# Altium PCB alarm_timing.PcbDoc
Units mm, origin at the board's own origin, x right, y up, seen from the top; angles counter-clockwise.
Board outline 60.07 x 57.28 mm, 2 copper layers (Top Layer, Bottom Layer); 44 components, 30 nets, 163 pads, 8 vias.
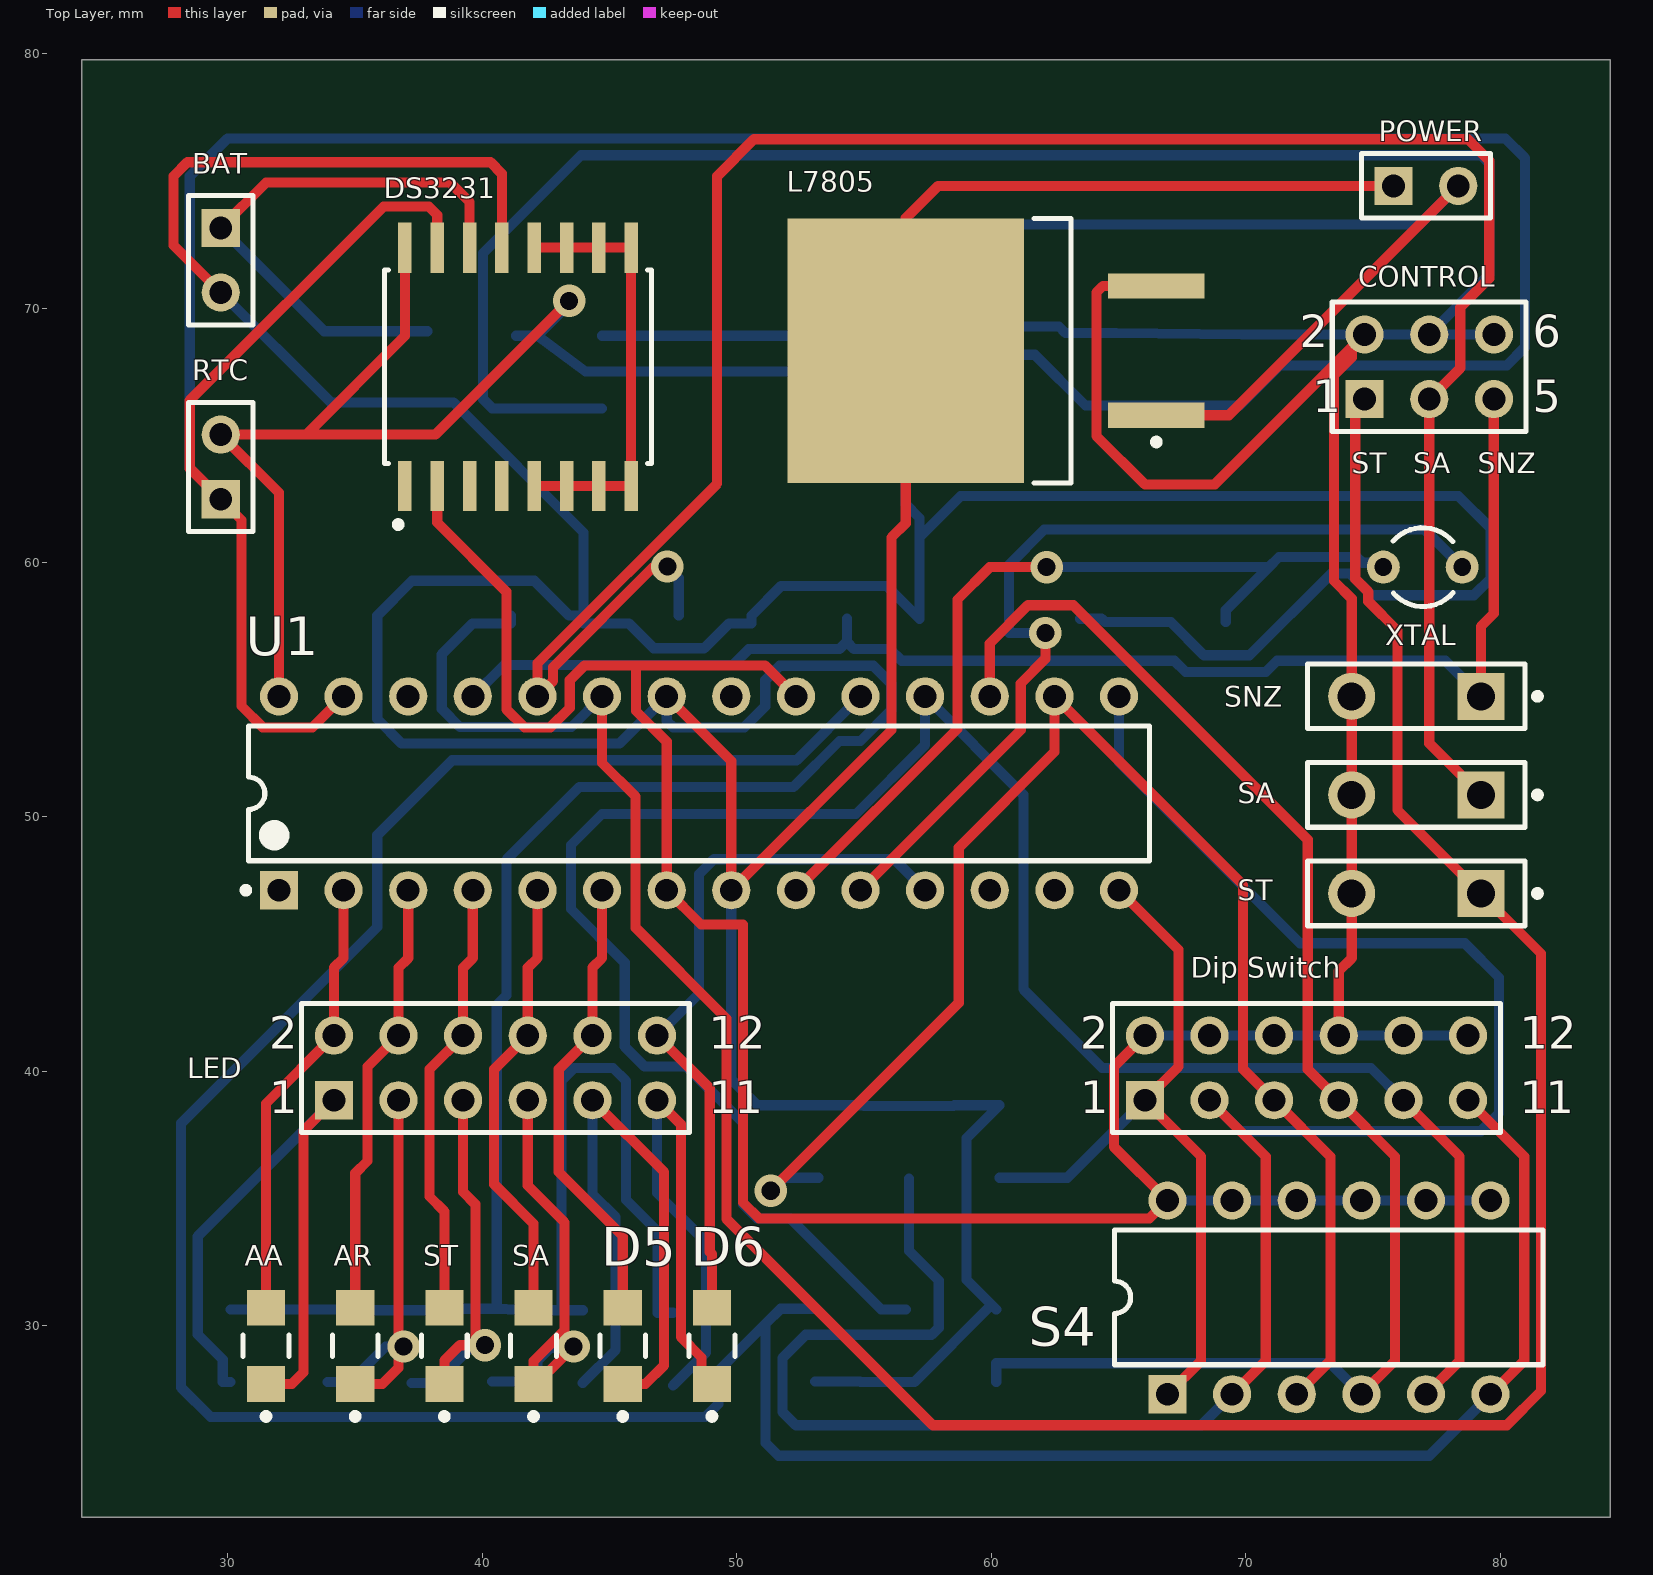
[diagram p0: Top Layer view]
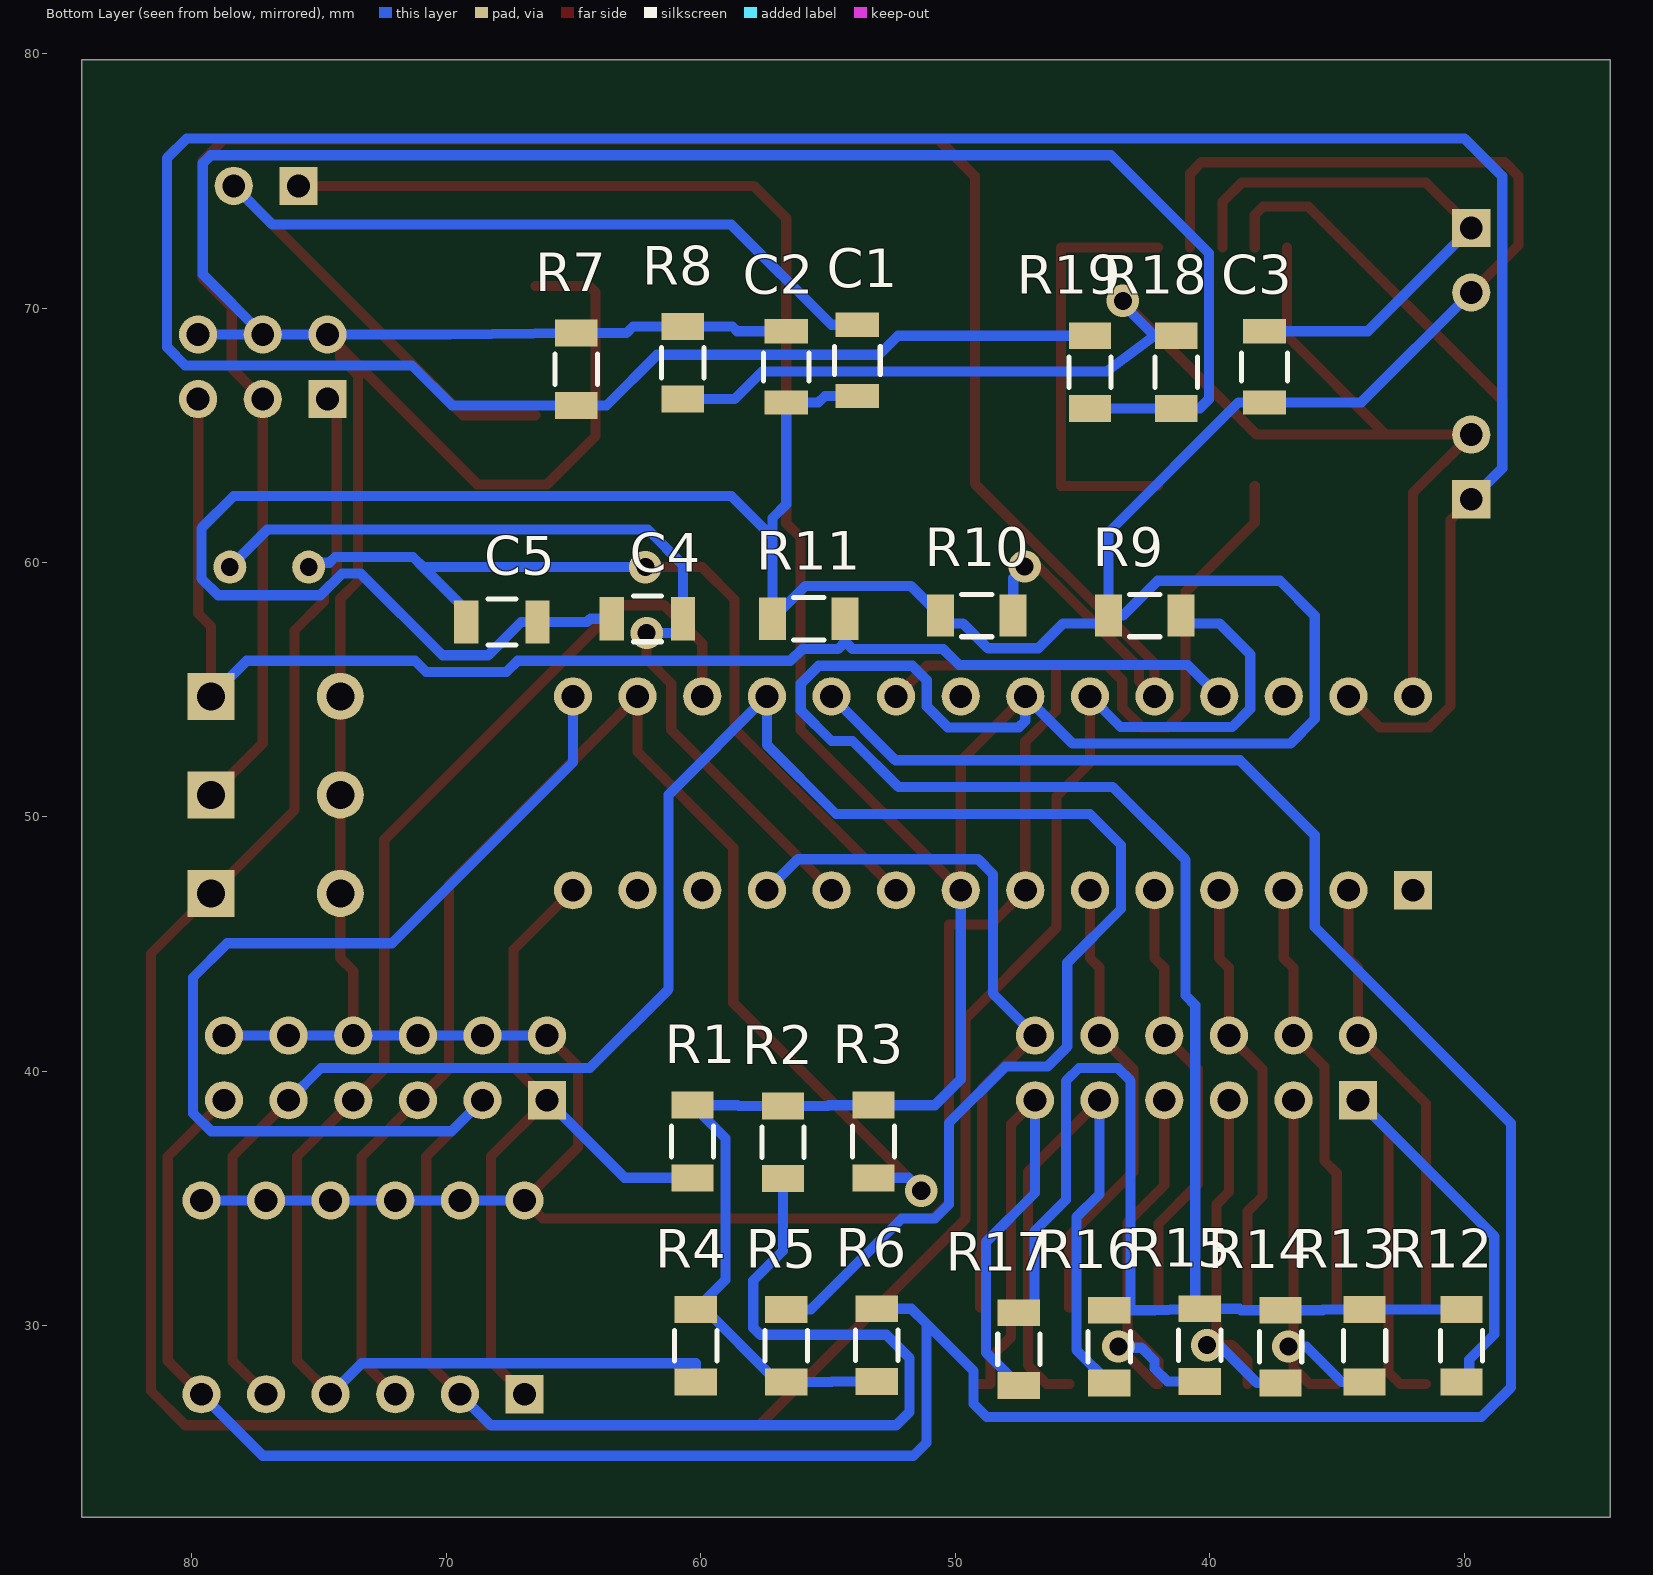
[diagram p1: Bottom Layer view, seen from below]
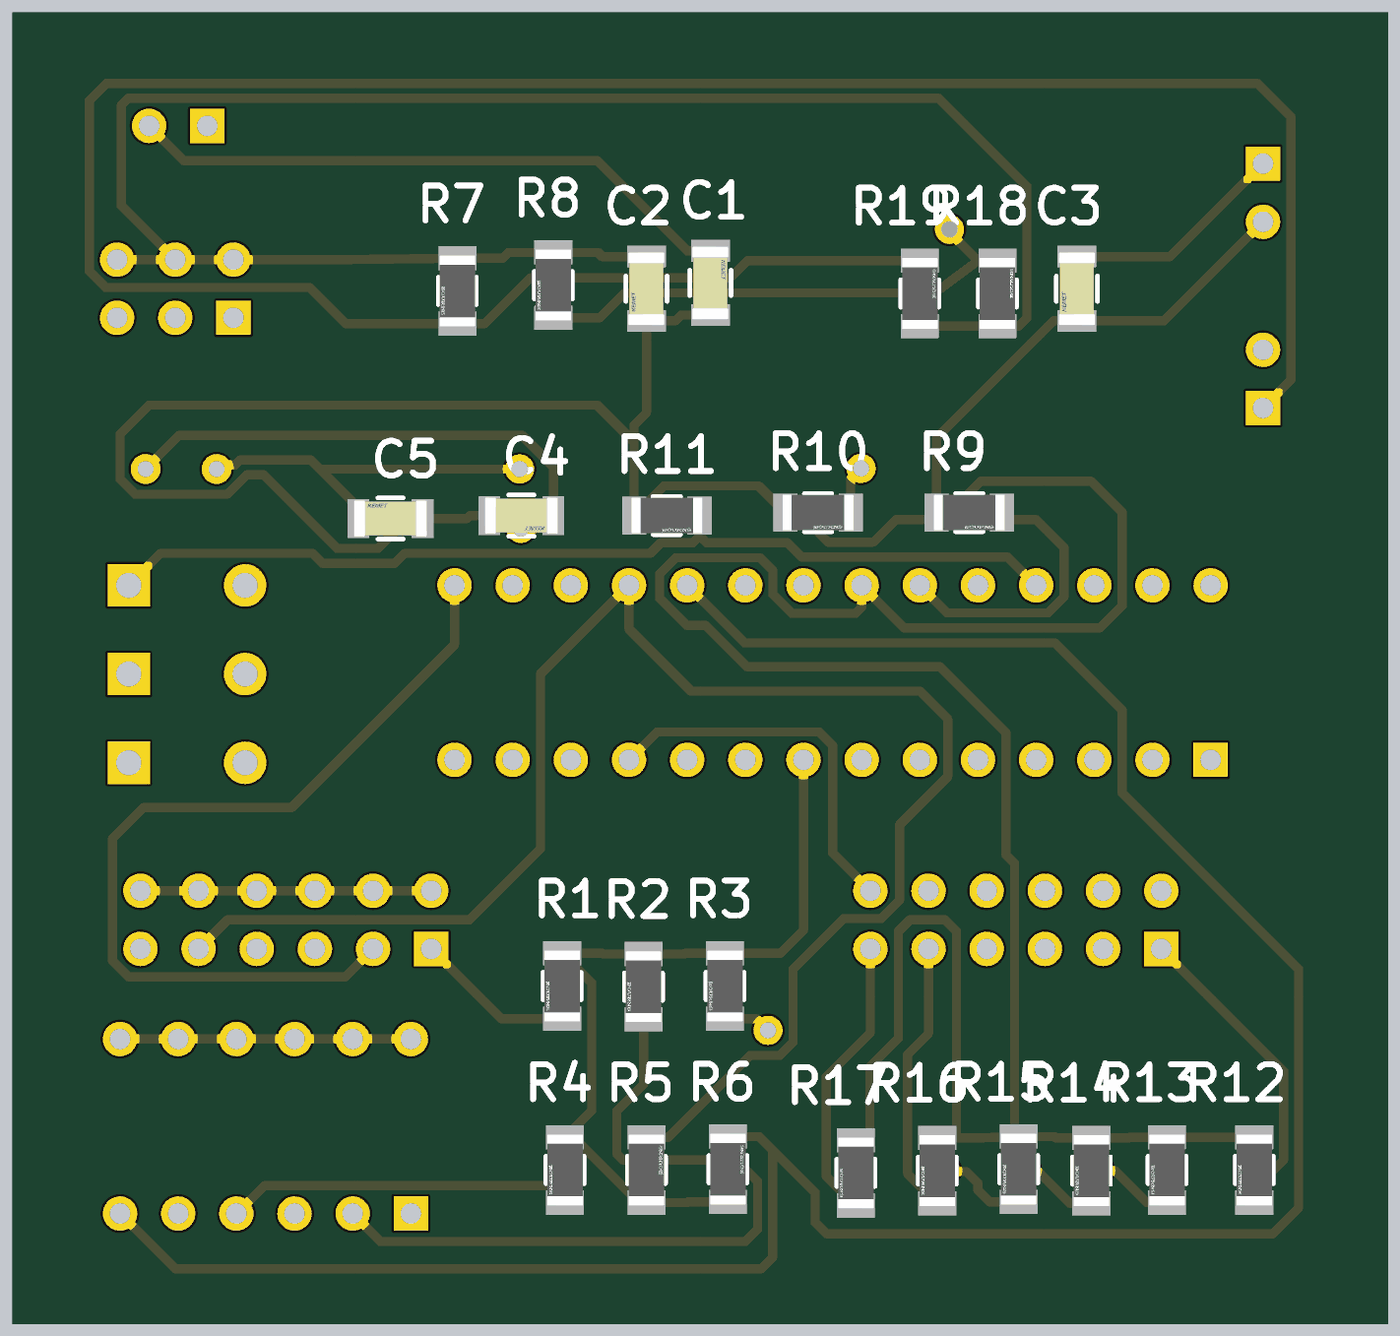
[diagram p2: 3D render of the assembled board from below, using the file's embedded part models]

## Layer stack, top to bottom
Top Solder: solder mask 0.0102, Solder Resist, Dk 3.5
Top Layer: signal copper 0.0356
Dielectric 1: dielectric 0.32, FR-4, Dk 4.8
Bottom Layer: signal copper 0.0356
Bottom Solder: solder mask 0.0102, Solder Resist, Dk 3.5

## Board outline
24.257,22.479 84.328,22.479 84.328,79.756 24.257,79.756

## Design rules (kind name [scope] priority, off if disabled: settings)
Clearance [All] p1: gap=0.254 ignorepadtopadclearanceinfootprint=FALSE except(0: Arc-Hole Track-Hole SMDPad-Hole THPad-Hole Via-Hole Fill-Hole Poly-Hole Region-Hole Text-Hole)
PolygonConnect [All] p1: connectstyle=Relief reliefconductorwidth=0.254 reliefentries=4 polygonreliefangle="90 Angle" airgapwidth=0.254
RoutingVias [All] p1: holewidth=0.711 width=1.27 viastyle="Through Hole" minholewidth=0.711 minwidth=1.27 maxholewidth=0.711 maxwidth=1.27
SolderMaskExpansion [All] p1: expansion=0.102 istentingtop=FALSE
Width [All] p1: maxlimit=0.6 minlimit=0.254 preferedwidth=0.4
30 further rules are at their usual default settings.

## Classes and differential pairs
component class DS3231: BAT C3 DS3231 R18 R19
component class alarm_timing: AA AR C1 C2 C4 C5 CONTROL "Dip Switch" H L7805 LED M POWER R1 R2 R3 R4 R5 R6 R7 R8 R9 R10 R11 R12 R13 R14 R15 R16 R17 RTC S4 SA SNZ ST U1 XTAL

## Components (designator, comment, footprint, x,y, rotation, side; value= is the part's Value field where it differs from the comment)
AA "" FP-598-82-MFG 31.496,29.21 r90 top (schematic designator D1)
AR "" FP-598-82-MFG 35.001,29.21 r90 top (schematic designator D2)
BAT "Header 2" HDR1X2 29.718,73.152 r270 top (schematic designator P6)
C1 "0.33uF" FP-C1206C-EB-MFG 53.848,67.945 r270 bottom value="0.33 μF"
C2 "0.1uF" FP-C1206C-EB-MFG 56.642,67.691 r90 bottom value="0.33 μF"
C3 "0.01uF" FP-C1206C-EB-MFG 37.846,67.691 r90 bottom value="0.33 μF"
C4 "" FP-C1206C-EB-MFG 62.103,57.785 r0 bottom value="0.10 μF"
C5 "" FP-C1206C-EB-MFG 67.818,57.658 r180 bottom value="0.10 μF"
CONTROL "Control" HDR2X3 74.676,66.421 r0 top (schematic designator P4)
D5 "" FP-598-82-MFG 45.517,29.21 r90 top
D6 "" FP-598-82-MFG 49.022,29.21 r90 top
"Dip Switch" "DipSwitch" HDR2X6 66.04,38.862 r0 top (schematic designator P1)
DS3231 "DS3231SN#T&R" FP-W16-H2-MFG 41.402,67.691 r90 top (schematic designator U3)
L7805 "L7805" TO-263_N 60.192,68.326 r180 top (schematic designator U2)
LED "LED" HDR2X6 34.163,38.862 r0 top (schematic designator P5)
POWER "POWER" HDR1X2 75.819,74.803 r0 top (schematic designator P2)
R1 "" FP-CR1206-IPC_B 60.325,37.241 r270 bottom
R2 "" FP-CR1206-IPC_B 56.769,37.211 r270 bottom
R3 "" FP-CR1206-IPC_B 53.213,37.241 r270 bottom
R4 "" FP-CR1206-IPC_B 60.198,29.21 r270 bottom
R5 "" FP-CR1206-IPC_B 56.642,29.21 r90 bottom
R6 "" FP-CR1206-IPC_B 53.086,29.24 r90 bottom
R7 "" FP-CR1206-IPC_B 64.897,67.594 r270 bottom
R8 "" FP-CR1206-IPC_B 60.706,67.848 r270 bottom
R9 "" FP-CR1206-IPC_B 42.545,57.912 r180 bottom
R10 "" FP-CR1206-IPC_B 49.149,57.912 r180 bottom
R11 "" FP-CR1206-IPC_B 55.753,57.785 r180 bottom
R12 "" FP-CR1206-IPC_B 30.099,29.21 r270 bottom
R13 "" FP-CR1206-IPC_B 33.909,29.21 r270 bottom
R14 "" FP-CR1206-IPC_B 37.211,29.18 r270 bottom
R15 "" FP-CR1206-IPC_B 40.386,29.24 r270 bottom
R16 "" FP-CR1206-IPC_B 43.942,29.18 r270 bottom
R17 "" FP-CR1206-IPC_B 47.498,29.083 r270 bottom
R18 "" FP-CR1206-IPC_B 41.316,67.485 r90 bottom
R19 "" FP-CR1206-IPC_B 44.704,67.485 r90 bottom
RTC "RTC Clock" HDR1X2 29.718,62.484 r90 top (schematic designator P3)
S4 "SW DIP-6" DIP-12/SW 73.279,31.115 r0 top
SA "" SPST-2 76.708,50.863 r180 top (schematic designator S2)
SA "" FP-598-82-MFG 42.012,29.21 r90 top (schematic designator D4)
SNZ "" SPST-2 76.708,54.737 r180 top (schematic designator S3)
ST "" SPST-2 76.708,46.99 r180 top (schematic designator S1)
ST "" FP-598-82-MFG 38.506,29.21 r90 top (schematic designator D3)
U1 "ATmega328P-PU" 28P3 48.514,50.927 r90 top
XTAL "XTAL" R38 76.962,59.817 r90 top (schematic designator Y1)

## Footprints (in the part's own frame and the unit in brackets; to place one, negate y for a bottom-side part, rotate by r counter-clockwise, add the part's x,y. Pads: shape width x height; smd on the part's side, far side on the other; paste and mask are expansions set on the pad)
28P3 [mm] "28-Pin Plastic Dual In-Line Package (PDIP)"
  rect 1.5x1.5 hole 0.9: 1(-3.81,16.51)
  round 1.5 hole 0.9: 2(-3.81,13.97) 3(-3.81,11.43) 4(-3.81,8.89) 5(-3.81,6.35) 6(-3.81,3.81) 7(-3.81,1.27) 8(-3.81,-1.27) 9(-3.81,-3.81) 10(-3.81,-6.35) 11(-3.81,-8.89) 12(-3.81,-11.43) 13(-3.81,-13.97) 14(-3.81,-16.51) 15(3.81,-16.51) 16(3.81,-13.97) 17(3.81,-11.43) 18(3.81,-8.89) 19(3.81,-6.35) 20(3.81,-3.81) 21(3.81,-1.27) 22(3.81,1.27) 23(3.81,3.81) 24(3.81,6.35) 25(3.81,8.89) 26(3.81,11.43) 27(3.81,13.97) 28(3.81,16.51)
  silkscreen extent -3.93,-17.7 2.65,17.93, body extent -3.6,-17.65 3.6,17.65, height 4.58
DIP-12/SW [mm] "DIP Switch; 12 Leads"
  rect 1.5x1.5 hole 0.9: 1(-6.35,-3.81)
  round 1.5 hole 0.9: 2(-3.81,-3.81) 3(-1.27,-3.81) 4(1.27,-3.81) 5(3.81,-3.81) 6(6.35,-3.81) 7(6.35,3.81) 8(3.81,3.81) 9(1.27,3.81) 10(-1.27,3.81) 11(-3.81,3.81) 12(-6.35,3.81)
  silkscreen extent -8.43,-2.65 8.41,2.65
FP-598-82-MFG [mm]
  rect 1.4x1.5 smd paste+0 mask+0: 1(-1.5,0) 2(1.5,0)
  silkscreen extent -2.9,-0.9 0.42,0.9, body extent -2.3,-1 2.3,1, height 0.25
FP-C1206C-EB-MFG [mm]
  rect 0.95x1.7 smd paste+0 mask+0: 1(-1.4,0) 2(1.4,0)
  silkscreen extent -0.55,-0.9 0.55,0.9, body extent -1.6,-0.8 1.6,0.8, height 0.88
FP-CR1206-IPC_B [mm]
  rect 1.058x1.662 smd paste+0 mask+0: 1(-1.427,0) 2(1.427,0)
  silkscreen extent -0.6,-0.83 0.6,0.83, body extent -1.55,-0.77 1.55,0.77, height 0.65
FP-W16-H2-MFG [mm]
  rect 1.98x0.53 smd paste+0 mask+0: 1(-4.685,4.445) 2(-4.685,3.175) 3(-4.685,1.905) 4(-4.685,0.635) 5(-4.685,-0.635) 6(-4.685,-1.905) 7(-4.685,-3.175) 8(-4.685,-4.445) 9(4.685,-4.445) 10(4.685,-3.175) 11(4.685,-1.905) 12(4.685,-0.635) 13(4.685,0.635) 14(4.685,1.905) 15(4.685,3.175) 16(4.685,4.445)
  silkscreen extent -6.32,-5.25 3.8,5.25, body extent -5.78,-5.43 5.77,5.43, height 0.25
HDR1X2 [mm] "Connector; Header; 2 Position"
  rect 1.5x1.5 hole 0.9: 1(0,0)
  round 1.5 hole 0.9: 2(2.54,0)
  silkscreen extent -1.27,-1.27 3.81,1.27
HDR2X3 [mm] "Connector; Header; 3x2 Position"
  rect 1.5x1.5 hole 0.9: 1(0,0)
  round 1.5 hole 0.9: 2(0,2.54) 3(2.54,0) 4(2.54,2.54) 5(5.08,0) 6(5.08,2.54)
  silkscreen extent -1.27,-1.27 6.35,3.81
HDR2X6 [mm] "Connector; Header; 6x2 Position"
  rect 1.5x1.5 hole 0.9: 1(0,0)
  round 1.5 hole 0.9: 2(0,2.54) 3(2.54,0) 4(2.54,2.54) 5(5.08,0) 6(5.08,2.54) 7(7.62,0) 8(7.62,2.54) 9(10.16,0) 10(10.16,2.54) 11(12.7,0) 12(12.7,2.54)
  silkscreen extent -1.27,-1.27 13.97,3.81
R38 [mm] "Crystal, Thru-Hole; 2 Leads; Body 3.1 x 8.2 mm (Dia.xH)"
  round 1.3 hole 0.7: 1(0,1.55) 2(0,-1.55)
  silkscreen extent -1.55,-1.19 1.55,1.17
SPST-2 [mm] "Switch; 2 Leads"
  rect 1.85x1.85 hole 1.1: 1(-2.54,0)
  round 1.85 hole 1.1: 2(2.54,0)
  silkscreen extent -4.89,-1.27 4.28,1.27
TO-263_N [mm] "D2-PAK, 4-Leads, Body 9.2x10.2mm, Pitch 2.54mm, Lead Span 15.4mm, IPC Medium Density"
  rect 3.8x1 smd: 1(-6.3,2.54) 3(-6.3,-2.54)
  rect 9.3x10.4 smd: 4(3.55,0)
  silkscreen extent -6.43,-5.2 -1.5,5.2, body extent -2.95,-5.2 6.4,5.2, height 4.6

## Part data
AA AR D5 D6 SA ST: library part CMP-15384-000005-1, "LED RED CLEAR 1206 SMD", Colour=Red, Forward Current=20mA, Forward Voltage=2.1V, Manufacturer=Dialight, Manufacturer Part Number=598-8210-107F, Max Junction Temp=+105°C, Package=598-82, Power Dissipation=72mW, Reverse Voltage=5V, Temperature="-40°C to +100°C", Temperature Range High=+100°C, Temperature Range Low=-40°C, Automotive=No, Category=Diode, ComponentLink2Description=Datasheet, ComponentLink2URL=http://www.dialightsignalsandcomponents.com/Assets/Brochures_And_Catalogs/Indication/CBI_SMD_new/Dialight_CBI_data_598-1206_Apr2018.pdf, Device Class L1=Optoelectronics, Device Class L2=LEDs, Device Class L3=unset, Digikey Description="LED RED CLEAR 1206 SMD", Height=0.9mm, Lead Free=Yes, Led Orientation="Top View", Luminous Intensity=55mcd, Mouser Description="598 Series Red 1206 3.2 x 1.6 x 0.7 mm 140° Water Clear 55 mcd 2 V LED SMT", Octopart=https://octopart.com/598-8210-107f-dialight-868600, RoHS=TRUE, Viewing Angle=140°, Wavelength=633nm
BAT: "Header, 2-Pin", LatestRevisionDate=17-Jul-2002, LatestRevisionNote="Re-released for DXP Platform.", Publisher="Altium Limited"
C1 C2 C3: library part CMP-03020-001426-1, "1206 C 330nF Ceramic Multilayer Capacitor; 25 VDC; +125degC; X7R Dielec; +/-10%", Capacitance="0.33 μF", Manufacturer=KEMET, Manufacturer Part Number=C1206C334K3RACTU, Package=C1206C-EB, Temperature="-55°C to +150°C", Temperature Characteristic=X7R, Temperature Coefficient=15%, Temperature Range High=+150°C, Temperature Range Low=-55°C, Tolerance=0.1, Voltage Rating="25 V", Automotive=Yes, Automotive Grade="Grade 0", Category=Cap, ComponentLink2Description=Datasheet, ComponentLink2URL=https://content.kemet.com/datasheets/KEM_C1007_X8R_ULTRA_150C_SMD.pdf, Device Class L1="Passive Components", Device Class L2=Capacitors, Device Class L3="Ceramic Capacitors", Digikey Description="1206 C 330nF Ceramic Multilayer Capacitor; 25 VDC; +125degC; X7R Dielec; +/-10%", Height=0.88mm, Ipc Land Pattern Name=CAPC320160X78, Lead Free=Yes, Material=Ceramic, Mouser Description="Multilayer Ceramic Capacitors MLCC - SMD/SMT 25volts 0.33uF X7R 10%", Octopart=https://octopart.com/c1206c334k3ractu-kemet-133095, RoHS=TRUE
C4 C5: library part CMP-03020-000153-1, "CAP CER 0.1UF 100V X7R 1206", Capacitance="0.10 μF", Manufacturer=KEMET, Manufacturer Part Number=C1206C104K1RACTU, Package=C1206C-EB, Temperature="-55°C to +150°C", Temperature Characteristic=X7R, Temperature Coefficient=15%, Temperature Range High=+150°C, Temperature Range Low=-55°C, Tolerance=0.1, Voltage Rating="100 V", Automotive=Yes, Automotive Grade="Grade 0", Category=Cap, ComponentLink2Description=Datasheet, ComponentLink2URL=https://content.kemet.com/datasheets/KEM_C1007_X8R_ULTRA_150C_SMD.pdf, Device Class L1="Passive Components", Device Class L2=Capacitors, Device Class L3="Ceramic Capacitors", Digikey Description="CAP CER 0.1UF 100V X7R 1206", Height=0.88mm, Ipc Land Pattern Name=CAPC320160X78, Lead Free=Yes, Material=Ceramic, Mouser Description="CAP CER 0.1UF 100V X7R 1206", Octopart=https://octopart.com/c1206c104k1ractu-kemet-89521, RoHS=TRUE
CONTROL: library part "Header 3X2", "Header, 3-Pin, Dual row", LatestRevisionDate=17-Jul-2002, LatestRevisionNote="Re-released for DXP Platform.", Publisher="Altium Limited"
"Dip Switch" LED: library part "Header 6X2", "Header, 6-Pin, Dual row", LatestRevisionDate=17-Jul-2002, LatestRevisionNote="Re-released for DXP Platform.", Publisher="Altium Limited"
DS3231: library part CMP-0254-00375-2, "IC RTC CLK/CALENDAR I2C 16-SOIC", Case/Package=SOIC, Max Operating Temperature=85°C, Max Supply Voltage=5.5V, Min Operating Temperature=-40°C, Min Supply Voltage=2.3V, Operating Supply Voltage=3.3V, Package Quantity=1000, Contact Plating=Tin, Date Format=YY-MM-DD-dd, Interface=I2C, Lead Free="Lead Free", Logic Function=Clock, Mount="Surface Mount", Number of Pins=16, Packaging="Tape and Reel", Radiation Hardening=No, Time Format=HH:MM:SS
L7805: library part CMP-0244-00214-1, "Positive Voltage Regulator, 3-Pin D2PAK, Tape and Reel", ComponentLink1Description="Manufacturer URL", ComponentLink1URL=http://www.st.com, ComponentLink2Description=Datasheet, ComponentLink2URL=http://www.st.com/internet/com/TECHNICAL_RESOURCES/TECHNICAL_LITERATURE/DATASHEET/CD00000444.pdf, DatasheetVersion=16/11/2011, PackageDescription="3-Pin Transistor Outline Package 2.54 mm Pitch, 15.4 mm Lead Span (D2PAK)", PackageReference=TO-263, PackageVersion=2011
POWER RTC: library part "Header 2", "Header, 2-Pin", LatestRevisionDate=17-Jul-2002, LatestRevisionNote="Re-released for DXP Platform.", Publisher="Altium Limited"
R1 R2 R3 R4 R5 R6 R7 R8 R9 R10 R11 R12 R13 R14 R15 R16 R17 R18 R19: library part CMP-07231-005593-1, "Thick Film Chip Resistors 1206 10kΩ 0.25W 5% 200ppm/°C", Case Code (Imperial)=1206, Case Code (Metric)=3216, Max Operating Temperature=155°C, Max Power Dissipation=250mW, Min Operating Temperature=-55°C, Package Quantity=1, Resistance=10kR, Temperature Coefficient=200ppm/°C, Tolerance=5%, Voltage Rating=200V, Case/Package=1206, Composition="Thick Film", Contact Plating=Tin, Depth=1.6mm, Features="Moisture Resistant", Height=0.6mm, Length=3.2mm, Military Standard=Not, Mount="Surface Mount", Number of Pins=2, Number of Terminations=2, Packaging="Tape and Reel", Power Rating=250mW, Radiation Hardening=No, REACH SVHC="No SVHC", Termination=SMD/SMT, Thickness=610um, Voltage Rating (DC)=200V, Width=1.6mm
S4: "DIP Switch, 6 Position, SPST", LatestRevisionDate=17-Jul-2002, LatestRevisionNote="Re-released for DXP Platform.", PackageDescription="DIP Switch; 12 Leads", PackageReference=DIP-12/SW, Published=24-Mar-1999, Publisher="Altium Limited"
SA SNZ ST: library part SW-PB, "Switch", LatestRevisionDate=17-Jul-2002, LatestRevisionNote="Re-released for DXP Platform.", PackageDescription="Switch; 2 Leads", PackageReference=SPST-2, Published=24-Mar-1999, Publisher="Altium Limited"
U1: library part CMP-0095-00013-2, "8-bit AVR Microcontroller, 32KB Flash, 1KB EEPROM, 2KB SRAM, 28-pin PDIP, Industrial Grade (-40°C to 85°C)", ComponentLink1Description="Manufacturer URL", ComponentLink1URL=http://www.atmel.com/, ComponentLink2Description="ATmega48A/48PA/88A/88PA/168A/168PA/328/328P Datasheet", ComponentLink2URL=http://www.atmel.com/dyn/resources/prod_documents/8271.pdf, ComponentLink3Description="ATmega48A/48PA/88A/88PA/168A/168PA/328/328P Summary", ComponentLink3URL=http://www.atmel.com/dyn/resources/prod_documents/8271S.pdf, DatasheetVersion="revD, May-2011", PackageDescription="28-lead (0.300\"/7.62mm Wide) Plastic Dual Inline Package (PDIP)", PackageReference=28P3, PackageVersion="revB, Sep-2001", RevisionNote="DatasheetVersion updated. URLs added."
XTAL: "Crystal Oscillator", LatestRevisionDate=17-Jul-2002, LatestRevisionNote="Re-released for DXP Platform.", PackageDescription="Crystal, Thru-Hole; 2 Leads; Body 3.1 x 8.2 mm (Dia.xH)", PackageReference=R38, Published=8-Jun-2000, Publisher="Altium Limited"

## Via types
v1: diameter 1.27, hole 0.711, Top Layer to Bottom Layer, 8 vias

## Nets (pads, with @x,y where several pads share a name; then routed paths per layer and width w, separated by ;. In a path a pad name is that pad's centre, name@x,y a point inside that pad or via, vN(x,y) a via of type N, cw(c..) or ccw(c..) an arc to the next point about the centre after c; other vN are vias at no path point)
CS1: CONTROL.1 R9.2 ST.1@79.248,46.99 U1.23 | length 113.4
  Top Layer w0.4: U1.23 44.704,52.121 46.025,50.8 46.025,45.644 49.59,42.078 49.59,34.202 57.706,26.086 80.264,26.086 81.61,27.432 81.61,44.628 79.248,46.99 75.971,50.267 75.971,57.328 74.822,58.477 74.822,58.846 74.308,59.36 74.308,66.053 CONTROL.1
  Bottom Layer w0.4: R9.2 41.118,57.607 39.624,57.607 38.405,56.388 38.405,54.244 39.116,53.533 43.5,53.533 U1.23
CS2: CONTROL.3 R10.2 SA.1@79.248,50.863 U1.24 | length 91.1
  Top Layer w0.4: v1(47.269,59.842) 46.742,59.842 42.78,55.88 42.78,55.353 U1.24 42.164,56.038 49.225,63.1 49.225,75.184 50.673,76.632 78.74,76.632 79.578,75.794 79.578,71.171 78.435,70.028 78.435,67.64 CONTROL.3 77.216,52.895 SA.1@79.248,50.863
  Bottom Layer w0.4: v1(47.269,59.842) 47.722,59.39 R10.2
CS3: CONTROL.5 R11.2 SNZ.1 U1.25 | length 54.6
  Top Layer w0.4: SNZ.1 79.248,57.485 79.756,57.993 CONTROL.5
  Bottom Layer w0.4: U1.25 40.86,55.973 49.844,55.973 50.466,56.595 54.025,56.595 54.326,56.896 ; R11.2 54.326,56.896 ; SNZ.1 77.851,56.134 71.235,56.134 70.801,55.7 67.635,55.7 67.201,56.134 56.478,56.134 56.017,56.595 54.61,56.595 54.326,56.879 54.326,56.896
DS1: "Dip Switch.1" R1.2 S4.1 U1.14 | length 29.8
  Top Layer w0.4: U1.14 67.361,44.78 67.361,40.183 66.04,38.862 68.25,36.652 68.25,28.626 S4.1
  Bottom Layer w0.4: R1.2 62.992,35.814 66.04,38.862
DS2: "Dip Switch.3" R2.2 S4.2 U1.15 | length 85.1
  Top Layer w0.4: 68.58,38.862 70.79,36.652 70.79,28.626 S4.2
  Bottom Layer w0.4: R2.2 56.769,32.944 57.937,31.775 57.937,29.921 57.658,29.642 52.705,29.642 51.791,28.727 51.791,26.619 52.324,26.086 68.25,26.086 S4.2 ; U1.15 65.024,52.146 72.136,45.034 78.613,45.034 79.959,43.688 79.959,38.354 79.248,37.643 69.799,37.643 68.58,38.862
DS3: "Dip Switch.5" R3.2 S4.3 U1.16 | length 58.6
  Top Layer w0.4: v1(51.333,35.306) 58.725,42.697 58.725,48.789 62.484,52.549 U1.16 69.901,47.32 69.901,40.081 71.12,38.862 73.33,36.652 73.33,28.626 S4.3
  Bottom Layer w0.4: v1(51.333,35.306) 51.841,35.814 R3.2
DS4: "Dip Switch.7" R4.2 S4.4 U1.17 | length 58.4
  Top Layer w0.4: U1.17 59.944,56.817 61.443,58.315 63.224,58.315 72.441,49.098 72.441,40.081 73.66,38.862 75.87,36.652 75.87,28.626 S4.4
  Bottom Layer w0.4: R4.2 60.198,28.524 73.33,28.524 S4.4
DS5: "Dip Switch.9" R5.2 S4.5 U1.18 | length 86.3
  Top Layer w0.4: 76.2,38.862 78.41,36.652 78.41,28.626 S4.5
  Bottom Layer w0.4: R5.2 55.677,30.637 52.1,34.214 50.8,34.214 50.241,34.773 50.241,37.973 48.031,40.183 46.379,40.183 45.593,40.969 45.593,44.272 43.485,46.38 43.485,48.895 44.704,50.114 54.686,50.114 57.404,52.832 U1.18 61.265,50.876 61.265,43.231 64.364,40.132 74.93,40.132 76.2,38.862
DS6: "Dip Switch.11" R6.2 S4.6 U1.19 | length 121.5
  Top Layer w0.4: 78.74,38.862 80.95,36.652 80.95,28.626 S4.6
  Bottom Layer w0.4: R6.2 51.724,30.667 51.13,30.074 ; U1.19 52.352,52.225 38.814,52.225 35.865,49.276 35.865,45.669 28.16,37.964 28.16,27.568 29.312,26.416 48.768,26.416 49.276,26.924 49.276,28.219 51.13,30.074 ; S4.6 77.216,24.892 51.638,24.892 51.13,25.4 51.13,30.074
GND: BAT.2 C1.2 C2.1 C3.1 C4.2 C5.2 DS3231.13 L7805.4 POWER.1 R1.1 R2.1 R3.1 R4.1 R5.1 R6.1 R9.1 R10.1 R11.1 R12.1 R13.1 R14.1 R15.1 R16.1 R17.1 U1.8 U1.22 | length 318.2
  Top Layer w0.4: BAT.2 27.86,72.47 27.86,75.184 28.404,75.728 40.324,75.728 40.767,75.286 DS3231.13 ; U1.22 49.784,52.197 U1.8 56.083,53.416 56.083,60.985 56.642,61.544 L7805.4 56.642,73.533 57.912,74.803 POWER.1
  Bottom Layer w0.4: BAT.2 34.039,66.291 C3.1 38.862,66.291 43.972,61.181 R9.1 ; R12.1 R13.1 35.535,30.637 35.565,30.607 R14.1 38.76,30.607 38.82,30.667 R15.1 ; R16.1 43.104,30.607 ; R17.1 46.888,30.51 46.888,33.706 45.644,34.95 45.644,39.624 45.136,40.132 43.612,40.132 43.104,39.624 43.104,30.607 ; U1.8 49.784,39.684 50.8,38.668 R3.1 54.966,38.668 54.996,38.638 R2.1 58.522,38.638 58.552,38.668 R1.1 59.03,37.373 59.03,31.805 R4.1@60.012,30.823 ; R6.1 54.839,27.813 54.869,27.783 R5.1 56.972,27.783 R4.1@60.012,30.823 ; C1.2 55.118,66.545 55.372,66.291 C2.1 56.642,62.285 57.18,61.747 57.18,60.99 ; R4.1 R4.1@60.012,30.823 ; C4.2 64.34,57.785 64.467,57.658 C5.2 67.056,57.658 68.36,56.354 70.155,56.354 73.364,59.563 74.105,59.563 74.955,58.713 78.969,58.713 79.629,59.373 79.629,61.341 78.359,62.611 58.801,62.611 57.18,60.99 ; R15.1 42.173,30.607 43.104,30.607 ; R15.1 40.564,30.667 40.564,42.596 40.945,42.977 40.945,48.311 43.815,51.181 52.233,51.181 54.036,52.984 54.864,52.984 56.068,54.188 56.068,55.236 55.363,55.941 51.689,55.941 51.12,55.372 51.12,54.346 50.292,53.518 47.498,53.518 47.244,53.772 U1.22 45.386,52.879 36.834,52.879 35.865,53.848 35.865,57.912 37.236,59.284 42.037,59.284 43.409,57.912 R9.1 ; R9.1 43.972,57.607 45.756,57.607 46.736,56.627 48.717,56.627 49.697,57.607 50.576,57.607 R10.1 51.744,59.08 55.885,59.08 R11.1 57.18,60.99
LED1: AA.2 LED.2 U1.2 | length 17.7
  Top Layer w0.4: AA.2 31.496,38.735 LED.2 34.163,44.069 34.544,44.45 U1.2
LED1Out: AA.1 LED.1 R12.2 | length 26.9
  Top Layer w0.4: AA.1 32.512,27.71 32.969,28.167 32.969,37.668 LED.1
  Bottom Layer w0.4: R12.2 29.794,27.783 29.794,28.674 28.814,29.654 28.814,33.513 LED.1
LED2: AR.2 LED.4 U1.3 | length 17.3
  Top Layer w0.4: AR.2 35.001,35.992 35.484,36.474 35.484,40.183 LED.4 36.703,44.069 37.084,44.45 U1.3
LED2Out: AR.1 LED.3 R13.2 | length 16.3
  Top Layer w0.4: AR.1 36.068,27.71 36.703,28.345 v1@36.703,29.185 ; LED.3 v1@36.703,29.185 ; v1(36.906,29.185) v1@36.703,29.185
  Bottom Layer w0.4: R13.2 34.798,27.783 36.2,29.185 v1(36.906,29.185)
LED3: LED.6 ST.2@38.506,30.71 U1.4 | length 17.4
  Top Layer w0.4: ST.2@38.506,30.71 38.506,34.493 37.922,35.077 37.922,40.081 LED.6 39.243,44.069 39.624,44.45 U1.4
LED3Out: LED.5 R14.2 ST.1@38.506,27.71 | length 16.1
  Top Layer w0.4: ST.1@38.506,27.71 38.506,28.626 39.116,29.235 v1@39.726,29.235 ; LED.5 39.243,35.255 39.726,34.773 v1@39.726,29.235 ; v1(40.107,29.235) v1@39.726,29.235
  Bottom Layer w0.4: R14.2 38.142,27.753 39.624,29.235 v1(40.107,29.235)
LED4: LED.8 SA.2@42.012,30.71 U1.5 | length 17.8
  Top Layer w0.4: SA.2@42.012,30.71 42.012,34.011 40.462,35.56 40.462,40.081 LED.8 41.783,44.069 42.164,44.45 U1.5
LED4Out: LED.7 R15.2 SA.1@42.012,27.71 | length 18.4
  Top Layer w0.4: LED.7 41.783,35.509 43.231,34.061 43.231,29.82 42.012,28.6 42.012,27.71 42.112,27.71 v1(43.586,29.185)
  Bottom Layer w0.4: R15.2 41.656,27.813 42.164,28.321 42.164,28.626 42.672,29.134 43.586,29.134 v1(43.586,29.185)
LED5: D5.2 LED.10 U1.6 | length 18.2
  Top Layer w0.4: U1.6 44.704,44.45 44.323,44.069 LED.10 43.002,40.081 43.002,36.043 45.517,33.528 D5.2
LED5Out: D5.1 LED.9 R16.2 | length 25.5
  Top Layer w0.4: LED.9 47.142,36.043 47.142,28.448 46.404,27.71 D5.1
  Bottom Layer w0.4: R16.2 45.237,29.048 45.237,34.265 44.323,35.179 LED.9
LED6: D6.2 LED.12 U1.11 | length 28.3
  Top Layer w0.4: LED.12 48.936,39.329 48.936,32.909 49.022,32.823 D6.2
  Bottom Layer w0.4: LED.12 48.514,43.053 48.514,47.752 49.098,48.336 56.185,48.336 U1.11
LED6Out: D6.1 LED.11 R17.2 | length 24.8
  Top Layer w0.4: LED.11 47.803,37.922 47.803,29.566 48.616,28.753 48.616,27.71 D6.1
  Bottom Layer w0.4: LED.11 46.863,35.216 48.793,33.285 48.793,28.951 R17.2
NetU3_5: DS3231.5 DS3231.6 DS3231.7 DS3231.8 DS3231.9 DS3231.10 DS3231.11 DS3231.12 | length 17
  Top Layer w0.4: DS3231.5 DS3231.6 DS3231.7 DS3231.8 DS3231.9 DS3231.10 DS3231.11 DS3231.12
SCL: DS3231.16 R8.2 R18.2 RTC.2 U1.28 | length 58.3
  Top Layer w0.4: U1.28 32.004,62.738 RTC.2 33.071,65.024 ; DS3231.16 36.957,68.91 33.071,65.024 ; v1(43.409,70.282) 38.151,65.024 33.071,65.024
  Bottom Layer w0.4: R18.2 42.164,68.912 ; v1(43.409,70.282) 43.409,70.157 42.164,68.912 ; R8.2 58.674,66.421 57.587,67.508 44.051,67.508 42.164,68.912
SDA: DS3231.15 R7.2 R19.2 RTC.1 U1.27 | length 144.4
  Top Layer w0.4: U1.27 33.325,53.518 31.369,53.518 30.531,54.356 30.531,61.671 RTC.1 28.499,63.703 28.499,66.37 36.119,73.99 37.897,73.99 38.227,73.66 DS3231.15
  Bottom Layer w0.4: RTC.1 28.499,63.703 28.499,75.184 29.976,76.661 80.217,76.661 80.975,75.903 80.975,68.453 80.264,67.742 71.349,67.742 69.774,66.167 R7.2 63.703,66.167 61.708,68.162 52.996,68.162 52.246,68.912 R19.2
VBAT: BAT.1 C3.2 DS3231.14 | length 22.4
  Top Layer w0.4: BAT.1 31.496,74.93 38.735,74.93 39.497,74.168 DS3231.14
  Bottom Layer w0.4: BAT.1 33.779,69.091 C3.2
VCC: "Dip Switch.2" "Dip Switch.4" "Dip Switch.6" "Dip Switch.8" "Dip Switch.10" "Dip Switch.12" C2.2 CONTROL.2 CONTROL.4 CONTROL.6 DS3231.2 L7805.3 R7.1 R8.1 R18.1 R19.1 S4.7 S4.8 S4.9 S4.10 S4.11 S4.12 SA.2@74.168,50.863 SNZ.2 ST.2@74.168,46.99 U1.7 U1.20 | length 230.6
  Top Layer w0.4: DS3231.2 38.227,61.57 40.945,58.852 40.945,54.229 41.656,53.518 42.672,53.518 43.434,54.28 43.434,55.372 44.018,55.956 46.04,55.956 ; U1.20 51.105,55.956 46.04,55.956 ; 66.04,41.402 64.821,40.183 64.821,37.033 S4.12 66.218,34.214 50.876,34.214 50.244,34.846 50.244,45.771 48.59,45.771 U1.7 47.244,52.959 46.04,54.163 46.04,55.956 ; L7805.3 64.389,70.866 64.135,70.612 64.135,64.973 66.04,63.068 68.783,63.068 CONTROL.2@74.168,68.453 ; 73.66,41.402 73.66,43.942 74.168,44.45 74.168,46.99 74.168,50.863 SNZ.2 74.168,58.575 73.472,59.271 73.472,67.359 74.168,68.055 CONTROL.2@74.168,68.453 ; CONTROL.2 CONTROL.2@74.168,68.453
  Bottom Layer w0.4: R19.1 R18.1 40.386,66.058 40.03,66.414 40.03,72.161 43.876,76.007 79.263,76.007 79.578,75.692 79.578,71.323 CONTROL.4 ; C2.2 58.572,69.091 58.756,69.275 R8.1 62.662,69.275 62.916,69.021 R7.1 69.859,68.961 CONTROL.2 CONTROL.4 ; 66.04,41.402 68.58,41.402 71.12,41.402 73.66,41.402 76.2,41.402 78.74,41.402 ; S4.12 S4.11 S4.10 S4.9 S4.8 S4.7 ; CONTROL.6 CONTROL.4
VIN: C1.1 L7805.1 POWER.2 | length 42.4
  Top Layer w0.4: L7805.1 69.342,65.786 POWER.2
  Bottom Layer w0.4: C1.1 54.864,69.345 58.798,73.279 76.835,73.279 POWER.2
XTAL1: C5.1 U1.9 XTAL.1 | length 34.5
  Top Layer w0.4: U1.9 58.674,53.467 58.674,58.547 59.944,59.817 v1(62.179,59.817)
  Bottom Layer w0.4: v1(62.179,59.817) 70.911,59.817 ; C5.1 69.218,58.124 70.911,59.817 ; XTAL.1 75.24,59.989 74.603,59.989 74.376,60.217 71.31,60.217 70.911,59.817
XTAL2: C4.1 U1.10 XTAL.2 | length 36.2
  Top Layer w0.4: U1.10 61.163,53.416 61.163,55.245 62.128,56.21 v1(62.128,57.226)
  Bottom Layer w0.4: v1(62.128,57.226) 60.703,57.226 C4.1 60.703,59.916 62.078,61.29 77.039,61.29 XTAL.2
pads on no net: DS3231.1 DS3231.3 DS3231.4 U1.1 U1.12 U1.13 U1.21 U1.26

## Silkscreen, mask and mechanical layers (free items; w line width, h text height)
Top Overlay:
  text "ST" at 74.168,63.5 h0.8
  text "SA" at 76.581,63.5 h0.8
  text "SNZ" at 79.121,63.5 h0.8

## Text inside footprints (layer, text, board x,y; h text height)
CONTROL: Top Overlay "6" at 81.28,68.453 h1.27; Top Overlay "5" at 81.28,65.913 h1.27; Top Overlay "2" at 72.136,68.453 h1.27; Top Overlay "1" at 72.644,65.913 h1.27
"Dip Switch": Top Overlay "12" at 80.772,40.894 h1.27; Top Overlay "1" at 81.788,38.354 h1.27; Top Overlay "1" at 80.772,38.354 h1.27; Top Overlay "1" at 63.5,38.354 h1.27; Top Overlay "2" at 63.5,40.894 h1.27
LED: Top Overlay "12" at 48.895,40.894 h1.27; Top Overlay "1" at 49.911,38.354 h1.27; Top Overlay "1" at 48.895,38.354 h1.27; Top Overlay "1" at 31.623,38.354 h1.27; Top Overlay "2" at 31.623,40.894 h1.27